# Altium PCB USBiso.PcbDoc
Units mil, origin at the board's own origin, x right, y up, seen from the top; angles counter-clockwise.
Board outline 2523.11 x 1676.2 mil, 2 copper layers (Top Layer, Bottom Layer); 34 components, 25 nets, 117 pads, 60 vias.
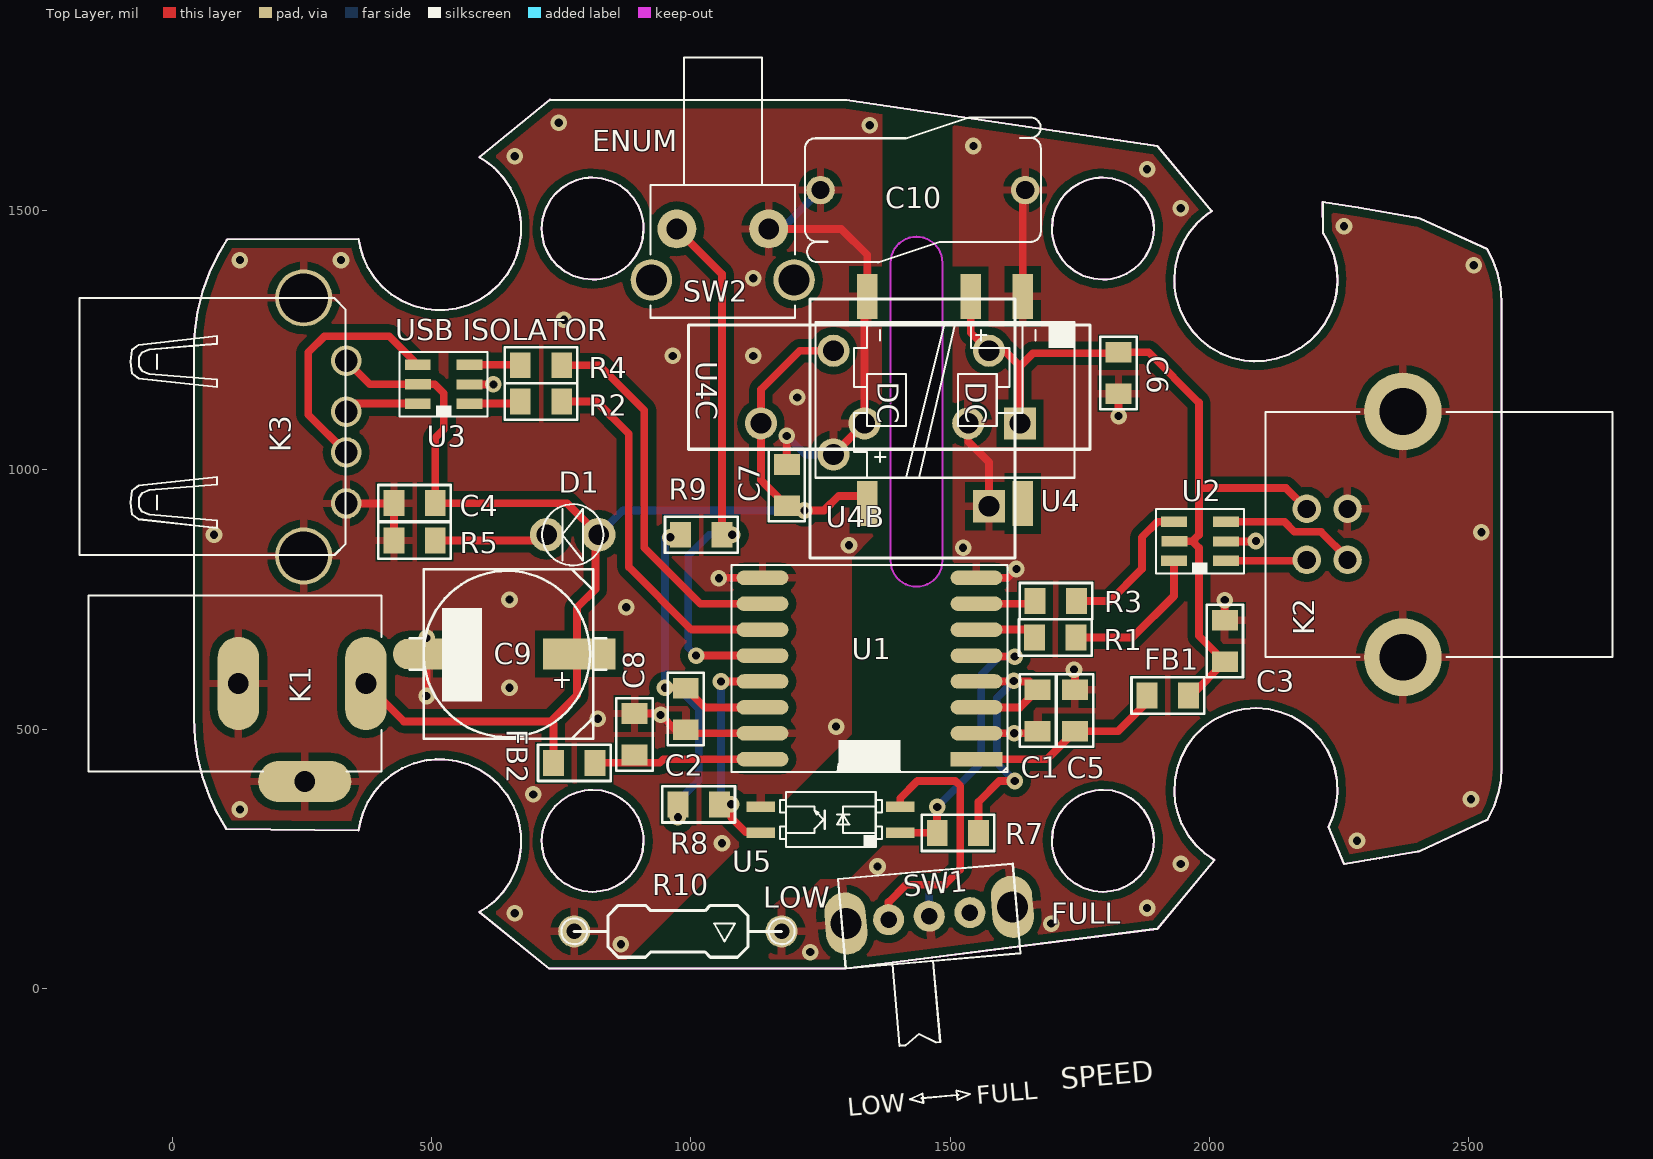
[diagram p0: Top Layer view]
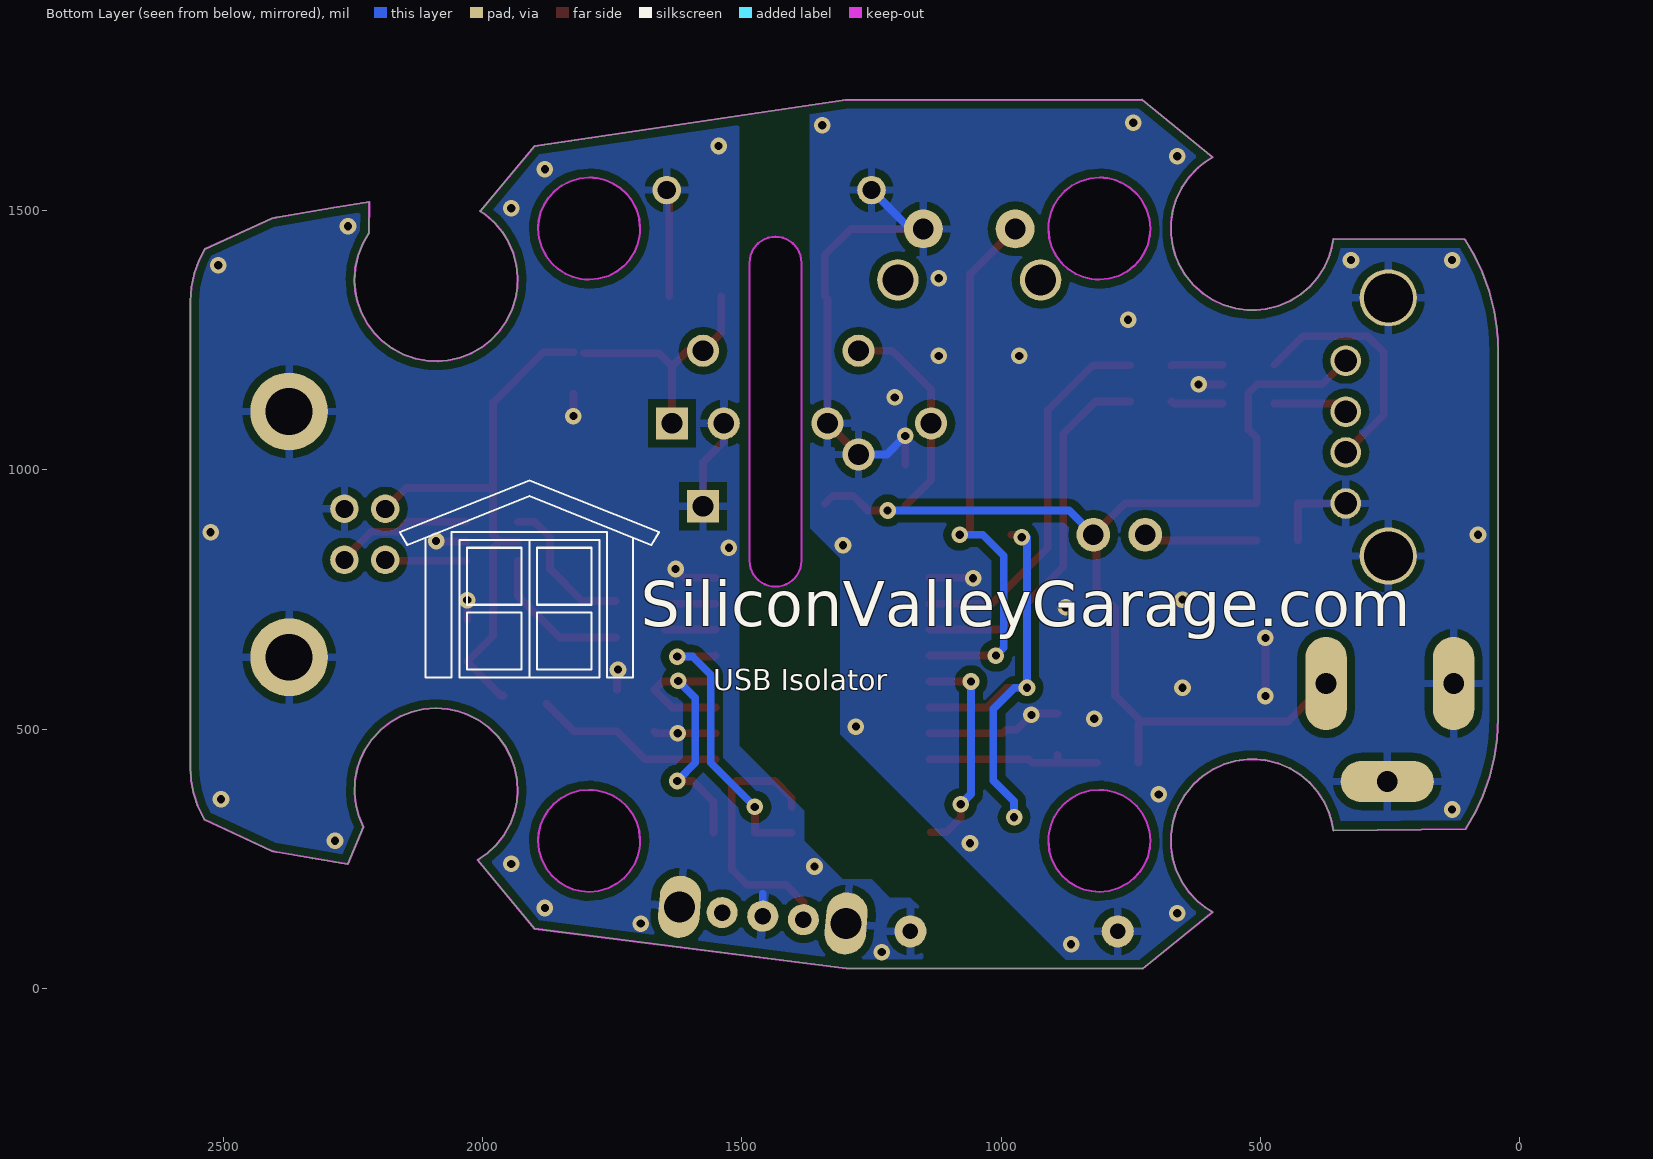
[diagram p1: Bottom Layer view, seen from below]

## Layer stack, top to bottom
Top Layer: signal copper 1.4
Dielectric: core 12.6, FR-4, Dk 4.8
Bottom Layer: signal copper 1.4

## Board outline
105.44,1445 358.95,1445.88 362.16,1428.46 367.13,1412.01 376.56,1390.95 389.5,1370.78 404.53,1353.62 421.79,1338.88 443.09,1325.67 466.08,1316.05 490.14,1310.2 507.75,1308.38 524.93,1308.5 547.8,1311.62 570.8,1318.35 591.5,1327.93 610.51,1340.33 629.19,1357.05 644.9,1376.39 657.29,1397.82 664.01,1414.21 668.73,1430.73 672.19,1453.54 672.22,1477.51 668.86,1500.07 662.32,1521.8 651.55,1544.44 637.42,1564.97 620.35,1582.9 606.52,1593.96 592,1603.15 728,1714.2 1299.68,1713.96 1900,1625 2005,1499.25 1994.81,1492.72 1976.15,1476.08 1961.72,1458.63 1949.89,1439.18 1940.94,1418.12 1934.91,1394.67 1932.56,1371.63 1933.18,1352.72 1936.21,1333.3 1943.41,1309.68 1954.29,1287.33 1968.66,1266.86 1984.31,1250.5 2002.24,1236.48 2022.12,1225.15 2044.71,1216.42 2067.32,1211.41 2086.17,1209.82 2105.81,1210.57 2130.11,1214.97 2153.57,1223.18 2175.58,1235.07 2193.65,1248.71 2209.66,1264.89 2223.23,1283.31 2234.52,1304.74 2242.13,1326.61 2245.9,1345.15 2247.44,1364.74 2245.9,1389.39 2240.48,1413.65 2231.23,1436.89 2219.79,1456.42 2218.86,1517.32 2287.5,1506.18 2397.09,1487.24 2399.78,1486.75 2402.47,1486.27 2406.78,1485.5 2536.17,1426.14 2547.73,1403.59 2556.35,1379.63 2562.16,1352.65 2564.14,1325.22 2564.14,425.04 2562.63,401.07 2558.18,377.4 2549.39,350.61 2537.1,325.68 2406.78,264.76 2404.09,264.28 2401.4,263.79 2397.09,263.02 2328.64,251.02 2260.08,239.56 2230.12,311.16 2238.97,331.99 2244.77,354 2247.34,376.74 2246.44,400.94 2242.12,423.7 2236.14,441.64 2227.7,459.39 2214.06,479.98 2197.25,498.3 2177.65,513.83 2157.98,525.05 2136.8,533.36 2114.51,538.56 2090.37,540.48 2067.27,538.84 2048.75,534.99 2030.14,528.67 2008.1,517.52 1987.95,502.96 1970.25,485.3 1956.82,467.07 1946.09,447 1938.34,425.47 1933.62,401.71 1932.56,378.58 1934.23,359.73 1938.34,340.51 1946.85,317.33 1958.97,295.63 1974.45,275.99 1990.99,260.52 2009.68,247.53 1900,115 1298.45,38.45 727,38 591.99,147.1 606.51,156.29 620.34,167.35 637.41,185.28 651.54,205.81 662.32,228.45 668.86,250.17 672.22,272.74 672.19,296.7 668.74,319.52 664.01,336.04 657.29,352.43 644.9,373.86 629.2,393.21 610.51,409.92 591.51,422.32 570.8,431.91 547.81,438.64 524.94,441.76 507.76,441.88 490.14,440.05 466.08,434.21 443.1,424.59 421.79,411.38 404.54,396.64 389.51,379.48 376.56,359.31 367.13,338.25 362.16,321.8 358.95,304.38 104.16,307.03 86.16,337.78 71,370.09 57.7,407.36 48.23,445.71 43.03,481.16 41.03,520.75 41.03,1229.51 41.56,1249.68 43.13,1269.85 48.46,1305.33 58.07,1343.92 71.35,1380.98 86.49,1413.09 104.57,1443.81
cut-out: 1385.22,1400 cw(c1435.22,1400) 1435.22,1450 cw(c1435.22,1400) 1485.22,1400 1485.22,825 cw(c1435.22,825) 1435.22,775 cw(c1435.22,825.22) 1385,825.22 1385,1400
cut-out: 1794.71,186.15 1802.36,186.45 1810.19,187.38 1825.43,191.07 1840.44,197.42 1854.53,206.42 1867.02,217.81 1877.35,231.12 1885.84,247.39 1891.4,266.19 1893.13,284.58 1892.84,292.23 1891.91,300.06 1888.22,315.3 1881.87,330.31 1872.87,344.4 1861.48,356.89 1848.17,367.22 1831.89,375.71 1813.1,381.27 1794.71,383 1787.06,382.7 1779.23,381.78 1763.99,378.09 1748.98,371.74 1734.89,362.74 1722.4,351.35 1712.07,338.04 1703.58,321.76 1698.02,302.97 1696.28,284.58 1696.58,276.93 1697.51,269.1 1701.2,253.86 1707.55,238.85 1716.55,224.76 1727.94,212.27 1741.25,201.94 1757.52,193.45 1776.32,187.89
cut-out: 810.46,186.15 818.11,186.45 825.94,187.38 841.18,191.07 856.18,197.42 870.27,206.42 882.77,217.81 893.1,231.12 901.59,247.39 907.15,266.19 908.88,284.58 908.58,292.23 907.66,300.06 903.96,315.3 897.61,330.31 888.62,344.4 877.23,356.89 863.92,367.22 847.64,375.71 828.85,381.27 810.46,383 802.8,382.7 794.98,381.78 779.74,378.09 764.73,371.74 750.64,362.74 738.14,351.35 727.82,338.04 719.33,321.76 713.76,302.97 712.03,284.58 712.33,276.93 713.26,269.1 716.95,253.86 723.3,238.85 732.29,224.76 743.68,212.27 757,201.94 773.27,193.45 792.06,187.89
cut-out: 810.46,1367.25 818.11,1367.55 825.94,1368.48 841.18,1372.17 856.18,1378.52 870.27,1387.52 882.77,1398.91 893.1,1412.22 901.59,1428.49 907.15,1447.29 908.88,1465.68 908.58,1473.33 907.66,1481.16 903.96,1496.4 897.61,1511.41 888.62,1525.5 877.23,1537.99 863.92,1548.32 847.64,1556.81 828.85,1562.37 810.46,1564.1 802.8,1563.81 794.98,1562.88 779.74,1559.19 764.73,1552.84 750.64,1543.84 738.14,1532.45 727.82,1519.14 719.33,1502.87 713.76,1484.07 712.03,1465.68 712.33,1458.03 713.26,1450.2 716.95,1434.96 723.3,1419.95 732.29,1405.86 743.68,1393.37 757,1383.04 773.27,1374.55 792.06,1368.99
cut-out: 1794.71,1367.25 1802.36,1367.55 1810.19,1368.48 1825.43,1372.17 1840.44,1378.52 1854.53,1387.52 1867.02,1398.91 1877.35,1412.22 1885.84,1428.49 1891.4,1447.29 1893.13,1465.68 1892.84,1473.33 1891.91,1481.16 1888.22,1496.4 1881.87,1511.41 1872.87,1525.5 1861.48,1537.99 1848.17,1548.32 1831.89,1556.81 1813.1,1562.37 1794.71,1564.1 1787.06,1563.81 1779.23,1562.88 1763.99,1559.19 1748.98,1552.84 1734.89,1543.84 1722.4,1532.45 1712.07,1519.14 1703.58,1502.87 1698.02,1484.07 1696.28,1465.68 1696.58,1458.03 1697.51,1450.2 1701.2,1434.96 1707.55,1419.95 1716.55,1405.86 1727.94,1393.37 1741.25,1383.04 1757.52,1374.55 1776.32,1368.99

## Design rules (kind name [scope] priority, off if disabled: settings)
AssemblyTestPointUsage [All] p1 off:
AssemblyTestpoint [All] p1 off: testpointundercomponent=TRUE minsize=40 maxsize=100 preferedsize=60 minholesize=0 maxholesize=40 preferedholesize=32 testpointgrid=1 usegrid=TRUE gridtolerance=0.01 allowsidetop=TRUE allowsidebottom=TRUE
Clearance Clearance_1 [All vs InPolygon] p1: gap=15
Clearance [All] p2: gap=4
ComponentClearance [All] p1 off: gap=10 collisioncheckmode=3 verticalgap=10 showdistances=FALSE
DiffPairsRouting [All] p1 off: maxlimit=10 minlimit=10 mostfreqgap=10 maxuncoupledlength=500
FabricationTestPointUsage TestPointUsage [All] p1 off: valid=0 allowmultiple=FALSE
FabricationTestpoint Testpoint [All] p1 off: side=3 testpointundercomponent=TRUE minsize=40 maxsize=100 preferedsize=60 minholesize=0 maxholesize=40 preferedholesize=32 testpointgrid=1 allowsidetop=TRUE allowsidebottom=TRUE usegrid=TRUE gridtolerance=0.01
FanoutControl Fanout_BGA [IsBGA] p1 off: bgadir=Out bgaviamode=Centered fanoutstyle=Auto fanoutdirection=Alternating viagrid=1 // Fanout_BGA (Default Rule)
FanoutControl Fanout_LCC [IsLCC] p2 off: bgadir=Out bgaviamode=Centered fanoutstyle=Auto fanoutdirection=Alternating viagrid=1 // Fanout_LCC (Default Rule)
FanoutControl Fanout_SOIC [IsSOIC] p3 off: bgadir=Out bgaviamode=Centered fanoutstyle=Auto fanoutdirection=Alternating viagrid=1 // Fanout_SOIC (Default Rule)
FanoutControl Fanout_Small [(CompPinCount < 5)] p4 off: bgadir=Out bgaviamode=Centered fanoutstyle=Auto fanoutdirection=OutThenIn viagrid=1 // Fanout_Small (Default Rule)
FanoutControl Fanout_Default [All] p5 off: bgadir=Out bgaviamode=Centered fanoutstyle=Auto fanoutdirection=Alternating viagrid=1 // Fanout_Default (Default Rule)
Height [All] p1 off: minheight=0 maxheight=1000 prefheight=500
HoleSize [All] p1: absolutevalues=TRUE maxlimit=500 minlimit=1 maxpercent=80.000 minpercent=20.000
LayerPairs [All] p1 off: enforce=TRUE
MinimumAnnularRing "Minimum Annular Ring" [All] p1: minimumring=5 // This is manufacturing dependent. Sierra = 5. This can go to 4 if needed, but keep 5 if possible
MinimumSolderMaskSliver [All] p1 off: minsoldermaskwidth=10
PasteMaskExpansion [All] p1 off: expansion=0
PlaneClearance [All] p1: clearance=6
PlaneConnect "PlaneConnect GND" [InNet('GND')] p1: planeconnectstyle=Direct reliefexpansion=6 reliefentries=4 reliefconductorwidth=10 reliefairgap=6
PlaneConnect "PlaneConnect GENERIC" [All] p2: planeconnectstyle=Relief reliefexpansion=20 reliefentries=4 reliefconductorwidth=10 reliefairgap=10
PolygonConnect PolygonConnect_1 [ISVIA] p1: connectstyle=Direct reliefconductorwidth=10 reliefentries=4 polygonreliefangle="90 Angle"
PolygonConnect [All] p2: connectstyle=Relief reliefconductorwidth=15 reliefentries=4 polygonreliefangle="90 Angle"
RoutingPriority [All] p1 off: routingpriority=0
RoutingTopology [All] p1 off: topology=Shortest
RoutingVias "Routing Vias" [All] p1: holewidth=10 width=20 viastyle="Through Hole" minholewidth=10 minwidth=20 maxholewidth=80 maxwidth=100 // Generic routing via rules
ShortCircuit "Short Circuit Generic Rule" [All] p1: allowed=FALSE // Short circuit Rule : No shorts allowed
SilkToSilkClearance [All] p1 off: silktosilkclearance=10
SilkscreenOverComponentPads [All] p1 off: minsilkscreentomaskgap=10
SolderMaskExpansion "SolderMask Expansion Via's" [(IsVia)] p1: expansion=-40 // Via's should be painted closed. Set to -40
SolderMaskExpansion "Solder Mask Expansion Generic" [All] p2: expansion=2 // Generic solder mask expansion
UnRoutedNet "Un Routed Net" [All] p1:  // Broken Nets not allowed
Width [(InNetClass('common-6mil'))] p1: maxlimit=6 minlimit=6 preferedwidth=6 minimp=50.000000 maximp=50.000000 favimp=50.000000 // For Common-6MIL class
Width "Generic Width Rules" [All] p2: maxlimit=100 minlimit=3.5 preferedwidth=10 minimp=50.000000 maximp=50.000000 favimp=50.000000 // Generic width rules applicable if no specific rule is in effect
4 further rules are at their usual default settings.

## Components (designator, comment, footprint, x,y, rotation, side; value= is the part's Value field where it differs from the comment)
C1 "100nF" 0805C-TBD 1669,566 r270 top
C2 "100nF" 0805C-TBD 990,569 r270 top
C3 "100nF" 0805C-TBD 2030,640 r90 top
C4 "100nF" 0805C-TBD 497,936 r180 top
C5 "100nF" 0805C-TBD 1741,566 r270 top
C6 "10uF" 0805C-GENERIC 1825,1217 r270 top
C7 "10uF" 0805C-GENERIC 1185,940.75 r90 top
C8 "100nF" 0805C-TBD 891,460 r90 top
C9 "220uF-25V" PANACAP-F-GENERIC 645,645 r180 top
C10 "1nF - X1Y1" C-X1Y1-10MM 1250,1540 r0 top
D1 "LED-YELLOW-3MM" LED-3MM-YELLOW 822,875 r180 top
FB1 "1KZ" 0805FB-1KZ 1950,565 r180 top
FB2 "1KZ" 0805FB-1KZ 805,435 r180 top
K1 "DCPOWERJACK" DCPOWER 373,588 r0 top
K2 "USB-B" USB-B 2188,925 r90 top
K3 "USB-A" USB-A 335,1211 r270 top
R1 "27R" 0805R-27 1733,677 r180 top
R2 "27R" 0805R-27 741,1132 r180 top
R3 "27R" 0805R-27 1734,747 r180 top
R4 "27R" 0805R-27 741,1202 r180 top
R5 "330R" 0805R-330 427,864 r0 top
R7 "1K" 0805R-1K 1545,300 r180 top
R8 "1K" 0805R-1K 985,355 r0 top
R9 "10K" 0805R-10K 980,875 r0 top
R10 "1M *" R-1/4W-SAFETY 1175,110 r270 top
SW1 "SW-SPDT-CK-OS102011" CK-OS102011 1373,-224 r5 top
SW2 "ENUM" SW-OMRONRA-Y 1150,1465 r180 top
U1 "ADUM4160" SO16W 1551,442 r180 top
U2 "USBLC6-2" SOT23-6 2032,825 r180 top
U3 "USBLC6-2" SOT23-6 573,1128 r180 top
U4 "DCDC5V" VBT1-CUI 1640,1335 r270 top
U4B "DCDC5V" DCDC-DIP8 1575,930 r180 top
U4C "DCDC5V" DCDC-SIP5 1635,1090 r270 top
U5 "ACPL217" ACPL217 1403.9,300 r180 top

## Footprints (in the part's own frame and the unit in brackets; to place one, negate y for a bottom-side part, rotate by r counter-clockwise, add the part's x,y. Pads: shape width x height; smd on the part's side, far side on the other; paste and mask are expansions set on the pad)
0805C-GENERIC [mil] "CAPACITOR 0805"
  rect 40x50 smd: 1(-10,0) 2(70,0)
  silkscreen extent -40,-35 100,35, body extent -11,-25 70,25, height 26
0805C-TBD [mil] "CAPACITOR 0805"
  rect 40x50 smd: 1(-10,0) 2(70,0)
  silkscreen extent -40,-35 100,35, body extent -11,-25 70,25, height 26
0805FB-1KZ [mil] "FERRITE BEAD 0805"
  rect 40x50 smd: 1(-10,0) 2(70,0)
  silkscreen extent -40,-35 100,35, body extent -11,-25 70,25, height 26
0805R-1K [mil] "RESISTOR 0805"
  rect 40x50 smd: 1(-10,0) 2(70,0)
  silkscreen extent -40,-35 100,35, body extent -11,-25 70,25, height 27
0805R-10K [mil] "RESISTOR 0805"
  rect 40x50 smd: 1(0,0) 2(80,0)
  silkscreen extent -30,-35 110,35, body extent -1,-25 80,25, height 27
0805R-27 [mil] "RESISTOR 0805"
  rect 40x50 smd: 1(-10,0) 2(70,0)
  silkscreen extent -40,-35 100,35, body extent -11,-25 70,25, height 27
0805R-330 [mil] "RESISTOR 0805"
  rect 40x50 smd: 1(0,0) 2(80,0)
  silkscreen extent -30,-35 110,35, body extent -1,-25 80,25, height 27
ACPL217 [mm] "OPTOCOUPLER"
  rect 1.4x0.508 smd mask+0.051: 1(0,0) 2(0,-1.27) 3(6.83,-1.27) 4(6.83,0)
  silkscreen extent 0.9,-2 5.9,0.7, body extent -0.2,-1.9 6.8,0.7, height 2.05
C-X1Y1-10MM [mm] "X1Y1 CAPACITOR 10MM PITCH"
  round 1.4 hole 0.9: 1(0,0) 2(10.033,0)
  silkscreen extent -0.76,-3.55 10.79,3.56
CK-OS102011 [mil] "C&K CK-OS102011MA1QN1"
  round 60 hole 32 mask+2: C(118.11,354.33) NC(39.37,354.33) NO(196.85,354.33)
  oval 80x120 hole 60 mask+2: M1(279.53,358.27) M2(-43.31,354.33)
  silkscreen extent -51,110 287,441, body extent -51,111 288,441, height 200
DCDC-DIP8 [mil]
  rect 62x62 hole 40: 1(0,0)
  round 62 hole 40: 4(0,-300) 5(300,-300) 7(300,-100)
  silkscreen extent -50,-400 345,100
DCDC-SIP5 [mil]
  rect 62x62 hole 40: 1(0,0)
  round 62 hole 40: 2(0,-100) 4(0,-300) 6(0,-500)
  silkscreen extent -190,-640 50,135
DCPOWER [mil]
  oval 80x180 hole 40: 1(0,0) 2(-246,0)
  oval 180x80 hole 40: 3(-118,-189)
  silkscreen extent -535,-170 30,170
LED-3MM-YELLOW [mil]
  round 65 hole 40: A(0,0) K(100,0)
  silkscreen extent -9,-59 109,59, body extent -15,-63 114,67, height 250
PANACAP-F-GENERIC [mil]
  rect 140x59.06 smd: +(-140,0)
  oval 140x59.06 smd: -(150,0)
  silkscreen extent -192,-163 187,163, body extent -195,-163 195,163, height 402
R-1/4W-SAFETY [mil] "SAFETY RESISTOR"
  round 62 hole 30: 1(0,0) 2(0,-400)
  silkscreen extent -50,-425 50,25, body extent -46,-412 45,12, height 116
SO16W [mil]
  rect 100x28 smd: 1(0,0)
  oval 100x28 smd: 2(0,-50) 3(0,-100) 4(0,-150) 5(0,-200) 6(0,-250) 7(0,-300) 8(0,-350) 9(413,-350) 10(413,-300) 11(413,-250) 12(413,-200) 13(413,-150) 14(413,-100) 15(413,-50) 16(413,0)
  silkscreen extent -60,-375 473,25, body extent 5,-375 407,27, height 61
SOT23-6 [mil]
  rect 50x20 smd: 1(0,0) 2(0,-37) 3(0,-75) 4(100,-75) 5(99.41,-37.4) 6(100,0)
  silkscreen extent -35,-100 135,25, body extent 0,-95 99,20, height 52
SW-OMRONRA-Y [mil]
  round 75 hole 40: 1(0,0) 2(177.17,0)
  round 80 hole 60: M1(-49.21,98.42) M2(226.38,98.42)
  silkscreen extent -51,-331 228,171, body extent -87,-398 265,160, height 283
USB-A [mm]
  round 1.5 hole 1.1: 1(0,0) 2(2.5,0) 3(4.5,0) 4(7,0)
  round 2.8 hole 2.4: M0(-3.073,-2.083) M1(9.576,-2.083)
  silkscreen extent -3.08,-13.08 9.53,-0.03, body extent -4.42,-12.53 11.38,1.17, height 3.7
USB-B [mil]
  round 55 hole 35: 1(0,0) 2(-98.42,0) 3(-98.42,-78.74) 4(0,-78.74)
  round 150 hole 90.55: 5(-286.22,-185.43) 6(187.8,-185.43)
  silkscreen extent -285,-590 187,79, body extent -343,-590 243,79, height 437
VBT1-CUI [mm] "DC DC CONVERTOR"
  rect 2.2x1 smd mask+0.051: 1(0,0) 2(0,-2.54) 4(0,-7.62) 5(10.16,-7.62) 8(10.16,0)
  silkscreen extent 1.27,-10.16 8.89,2.54, body extent -0.77,-10.03 10.68,2.67, height 6.35

## Part data
C1 C2 C3 C4 C5 C8: library part 0805C-100nF-25V-X7R-MUR, "CAPACITOR 0805 CERAMIC"
C6 C7: library part 0805C-4U7-25V-X5R-TDK, "CAPACITOR 0805 CERAMIC"
C9: library part PANACAP-220UF-25V-FK, "GENERIC CAPACITOR POLARISED"
C10: library part C-X1Y1-10MM-1NF, "CAPACITOR X1Y1 CLASS"
FB1 FB2: library part 0805FB-1KZ, "FERRITE BEAD 1000 OHM 6A"
K1: "Connector, Power Jack, Mini .08\", Right Angle, Thru-Hole"
K2: "USB B DEVICE CONNECTOR"
K3: "USB A HOST CONNECTOR"
R1 R2 R3 R4: library part 0805R-27, "RESISTOR 0805 1/4 WATT THIN FILM"
R5: library part 0805R-330, "RESISTOR 0805 1/4 WATT THIN FILM"
R7 R8: library part 0805R-1K, "RESISTOR 0805 1/4 WATT THIN FILM"
R9: library part 0805R-10K, "RESISTOR 0805 1/4 WATT THIN FILM"
R10: library part TH4-1M-1/4W-SAFETY, "GENERIC THROUGH HOLE 1/4 WATT RESISTOR"
SW1: "SWITCH DPDT"
SW2: library part SW-PB-YELLOW-RA, "SW-D6-R / SW-DS-S / SW-14X14 / SW-7X7"
U1: "USB Isolator"
U2 U3: "USB ESD PROTECTION"
U4: library part VBT1-S5-S5-SMT, "DC DC CONVERTOR 5V - 5V SMT"
U4B: library part VBSD1-DIP, "DC DC CONVERTOR 5V - 5V"
U4C: library part VIBLSD1-SIP, "DC DC CONVERTOR 5V - 5V"
U5: "QUAD OPTOCOUPLER"

## Free pads (board coordinates)
  round 150 on Mech1 mask+2: 0(810,284) 1(1795,285) 2(1795,1466) 3(810,1466)

## Via types
v1: diameter 32, hole 16, Top Layer to Bottom Layer, 60 vias

## Nets (pads, with @x,y where several pads share a name; then routed paths per layer and width w, separated by ;. In a path a pad name is that pad's centre, name@x,y a point inside that pad or via, vN(x,y) a via of type N, cw(c..) or ccw(c..) an arc to the next point about the centre after c; other vN are vias at no path point)
GND: C1.2 C3.2 C5.1 C6.2 C10.2 K2.4 K2.5 K2.6 R10.1 SW1.C SW1.M1 SW1.M2 U1.2 U1.8 U2.2 U4.1 U4B.1 U4C.2 | length 810.1
  Top Layer w15: U4C.2 1535,1055 1575,1015 U4B.1 ; U1.2 v1(1624,492) 1665,492 C1.2 ; U1.8 1611,792 v1(1628,809) ; U4.1 1640,1535 C10.2 ; v1(1739,615) 1741,613 C5.1 ; v1(1825,1104) C6.2 ; C3.2 v1(2030,749) ; U2.2 2089,862 v1(2090,863)
  Bottom Layer w15: SW1.C 1459.78,181.78
  other v1: 1230,70 1695,125 1880,155 1360,235 1945,240 2285,285 2505,365 1525,850 2525,880 2510,1395 2260,1470 1945,1505 1880,1580 1545,1625
NetC1_1: C1.1 R7.1 U1.3 U1.4 | length 624.4
  Top Layer w15: U1.3 1635,542 C1.1 1653,592 U1.4 ; R7.1 1555,360 1595,400 v1(1625,400)
  Bottom Layer w15: v1(1623,593) 1590,560 1590,435 v1(1625,400)
NetC2_1: C2.1 R8.1 R9.1 U1.14 | length 833.4
  Top Layer w15: v1(950,580) 989,580 C2.1 1027,542 U1.14 ; v1@955,875 R9.1
  Bottom Layer w15: v1@955,875 950,870 v1(950,580) 974,580 1015,539 1015,401 975,361 v1(975,330)
  other v1: 960,870
NetC2_2: C2.2 C4.2 C7.2 C8.2 C9.- C10.1 K1.2 K1.3 K3.4 K3.M0 K3.M1 R5.1 R10.2 SW2.1 U1.9 U1.15 U3.2 U4.4 U4B.7 U4C.4 U5.3 | length 1583.7
  Top Layer w15: K3.4 426.41,935.41 C4.2 R5.1 ; v1(490,564) C9.-@490,619 ; C9.-@490,621 v1(490,676) ; U3.2 v1(619,1165) ; C8.2 939,530 v1(941.5,527.5) 970,499 C2.2 997,492 U1.15 ; v1(1054,791) 1055,790 1057,792 U1.9 ; SW2.1 1290,1465 1340,1415 U4.4 1335,1330 U4C.4 U4B.7 ; C7.2 v1(1185,1065.75)
  Bottom Layer w15: v1(1054,791) v1@1054,793 ; SW2.1 1175,1465 C10.1 ; v1(1185,1065.75) 1220.75,1030 U4B.7
  other v1: 865,85 660,145 1060,280 130,345 695.99,374.04 1280,505 820,520 650,580 875,735 650,750 1305,855 80,875 1205,1140 965,1220 1120,1220 755,1290 1120,1370 130,1405 325,1405 660,1605 1345,1665 745,1670
NetC3_1: C3.1 C6.1 FB1.1 K2.1 U2.5 U4.2 U4B.4 U4C.1 | length 1564.9
  Top Layer w15: U4.2 1540,1265 U4B.4 1605,1230 1635,1200 ; U4C.1 1635,1200 ; C6.1@1805,1225 1660,1225 1635,1200 ; C6.1 1883,1227 1980,1130 1980,965 ; U2.5 1967.6,862.4 ; FB1.1 1965,565 C3.1 1980,680 1980,850 1967.6,862.4 ; K2.1 2148,965 1980,965 ; 1967.6,862.4 1980,874.8 1980,965
NetC4_1: C4.1 C7.1 C9.+ D1.A FB2.2 K1.1 K3.1 U3.5 U4.5 U4B.5 U4C.6 | length 2611.7
  Top Layer w15: K3.1 380.6,1165.4 U3.5 505.6,1165.4 523,1148 523,1078 507,1062 C4.1 761,936 D1.A 816,869 816,770 780,734 780,565 730,515 ; K1.1 446,515 730,515 ; FB2.2 735,510 730,515 ; C7.1 1135,980.75 U4C.6 1135,1155 1210,1230 U4B.5 ; v1(1219,921.75) 1256.75,921.75 1285,950 1325,950 U4.5
  Bottom Layer w15: D1.A 868.75,921.75 v1(1219,921.75)
NetC5_2: C5.2 FB1.2 U1.1 | length 370.3
  Top Layer w15: U1.1 1687,442 C5.2 1824,496 FB1.2@1877,549
NetC8_1: C8.1 FB2.1 U1.16 | length 340.9
  Top Layer w15: FB2.1 C8.1@891,435 ; C8.1 C8.1@891,435 ; U1.16 947,442 940,435 C8.1@891,435
NetD1_K: D1.K R5.2 | length 219.6
  Top Layer w15: R5.2 711,864 D1.K
NetK2_2: K2.2 U2.1 | length 157.9
  Top Layer w15: U2.1 2183.42,825 K2.2@2188,829.58
NetK2_3: K2.3 U2.3 | length 263.9
  Top Layer w15: U2.3 2145,900 2164,881 2215.32,881 K2.3@2266.74,829.58
NetK3_2: K3.2 U3.6 | length 144.4
  Top Layer w15: K3.2 350.43,1128 U3.6
NetK3_3: K3.3 U3.4 | length 470
  Top Layer w15: K3.3 262,1106.83 262,1227 293,1258 418,1258 U3.4
NetR1_1: R1.1 U2.6 | length 290.1
  Top Layer w15: R1.1 1852,677 1932,757 U2.6
NetR1_2: R1.2 U1.6 | length 97
  Top Layer w15: U1.6 R1.2@1648,692
NetR2_1: R2.1 U1.11 | length 719.8
  Top Layer w15: R2.1 818,1132 880,1070 880,813 1001,692 U1.11
NetR2_2: R2.2 U3.1 | length 99.7
  Top Layer w15: U3.1 667,1128 R2.2
NetR3_1: R3.1 U2.4 | length 287.1
  Top Layer w15: R3.1 1808,747 1870,809 1870,870 1900,900 U2.4
NetR3_2: R3.2 U1.7 | length 115.1
  Top Layer w15: U1.7 1659,742 R3.2
NetR4_1: R4.1 U1.10 | length 732.8
  Top Layer w15: R4.1 823,1202 910,1115 910,850 1018,742 U1.10
NetR4_2: R4.2 U3.3 | length 98.4
  Top Layer w15: U3.3 670,1203 R4.2
NetR7_2: R7.2 U1.5 U5.1 | length 565.6
  Top Layer w15: U5.1 R7.2 v1(1475,350) ; U1.5 1553,640 v1(1625,640)
  Bottom Layer w15: v1(1475,350) 1560,435 1560,605 1595,640 v1(1625,640)
NetR8_2: R8.2 U1.13 U5.4 | length 419.9
  Top Layer w15: v1(1058,592) U1.13 ; v1(1078,355) 1078,329 1106,301 U5.4@1135,301
  Bottom Layer w15: v1(1058,592) 1058,375 v1(1078,355)
NetR9_2: R9.2 SW2.2 U1.12 | length 1054.6
  Top Layer w15: SW2.2 1060,1377.83 R9.2 ; v1(1010,642) U1.12
  Bottom Layer w15: v1(1010,642) 995,657 995,834.5 1035.5,875 v1(1080,875)
NetSW1_NC: SW1.NC U5.2 | length 509.4
  Top Layer w15: SW1.NC 1381.34,166.34 1415,200 1490,200 1519.5,229.5 1519.5,390.5 1510,400 1436.97,400 1403.9,366.93 U5.2
pads on no net: SW1.NO SW2.M1 SW2.M2 U4.8

## Polygon pours and split planes (outlines as drawn)
NetC2_2 on Bottom Layer "TOP GND GND" (solid, remove dead copper, pour order 7): 1310,490 1310,830 1369,889 1369,1756.95 138.73,1756.95 5.73,1623.95 3.73,1623.95 3.73,319.95 333.73,-10.05 815.18,-6.65 815.18,-4.82
GND on Bottom Layer "TOP GND GND" (solid, remove dead copper, pour order 5): 1215.22,-7.78 1150,-10 1150,150 1175,175 1215,175 1250,210 1305,210 1380,285 1380,343.03 1505,468.03 1505,1775 1490,1780 2267.22,1778.22 2629.22,1416.22 2629.22,154.22 2485.22,10.22
NetC2_2 on Top Layer "TOP GND GND" (solid, remove dead copper, pour order 7): 1310,490 1310,830 1369,889 1369,1756.95 138.73,1756.95 5.73,1623.95 3.73,1623.95 3.73,319.95 333.73,-10.05 813.33,-6.67
GND on Top Layer "TOP GND GND" (solid, remove dead copper, pour order 5): 1215.22,-7.78 1150,-10 1150,150 1175,175 1215,175 1250,210 1305,210 1380,285 1380,343.03 1505,468.03 1505,1775 1490,1780 2267.22,1778.22 2629.22,1416.22 2629.22,154.22 2485.22,10.22

## Keep-outs
Keep-Out Layer:
  lines w4: 41.03,520.75 41.03,1229.51 41.56,1249.68 43.13,1269.85 48.46,1305.33 58.07,1343.92 71.35,1380.98 86.49,1413.09 104.57,1443.81 105.44,1445 358.95,1445.88 362.16,1428.46 367.13,1412.01 376.56,1390.95 389.5,1370.78 404.53,1353.62 421.79,1338.88 443.09,1325.67 466.08,1316.05 490.14,1310.2 507.75,1308.38 524.93,1308.5 547.8,1311.62 570.8,1318.35 591.5,1327.93 610.51,1340.33 629.19,1357.05 644.9,1376.39 657.29,1397.82 664.01,1414.21 668.73,1430.73 672.19,1453.54 672.22,1477.51 668.86,1500.07 662.32,1521.8 651.55,1544.44 637.42,1564.97 620.35,1582.9 606.52,1593.96 592,1603.15 728,1714.2 1299.68,1713.96 1900,1625 2005,1499.25 1994.81,1492.72 1976.15,1476.08 1961.72,1458.63 1949.89,1439.18 1940.94,1418.12 1934.91,1394.67 1932.56,1371.63 1933.18,1352.72 1936.21,1333.3 1943.41,1309.68 1954.29,1287.33 1968.66,1266.86 1984.31,1250.5 2002.24,1236.48 2022.12,1225.15 2044.71,1216.42 2067.32,1211.41 2086.17,1209.82 2105.81,1210.57 2130.11,1214.97 2153.57,1223.18 2175.58,1235.07 2193.65,1248.71 2209.66,1264.89 2223.23,1283.31 2234.52,1304.74 2242.13,1326.61 2245.9,1345.15 2247.44,1364.74 2245.9,1389.39 2240.48,1413.65 2231.23,1436.89 2219.79,1456.42 2218.86,1517.32 2287.5,1506.18 2397.09,1487.24 2399.78,1486.75 2402.47,1486.27 2406.78,1485.5 2536.17,1426.14 2547.73,1403.59 2556.35,1379.63 2562.16,1352.65 2564.14,1325.22 2564.14,425.04 2562.63,401.07 2558.18,377.4 2549.39,350.61 2537.1,325.68 2406.78,264.76 2404.09,264.28 2401.4,263.79 2397.09,263.02 2328.64,251.02 2260.08,239.56 2230.12,311.16 2238.97,331.99 2244.77,354 2247.34,376.74 2246.44,400.94 2242.12,423.7 2236.14,441.64 2227.7,459.39 2214.06,479.98 2197.25,498.3 2177.65,513.83 2157.98,525.05 2136.8,533.36 2114.51,538.56 2090.37,540.48 2067.27,538.84 2048.75,534.99 2030.14,528.67 2008.1,517.52 1987.95,502.96 1970.25,485.3 1956.82,467.07 1946.09,447 1938.34,425.47 1933.62,401.71 1932.56,378.58 1934.23,359.73 1938.34,340.51 1946.85,317.33 1958.97,295.63 1974.45,275.99 1990.99,260.52 2009.68,247.53 1900,115 1298.45,38.45 727,38 591.99,147.1 606.51,156.29 620.34,167.35 637.41,185.28 651.54,205.81 662.32,228.45 668.86,250.17 672.22,272.74 672.19,296.7 668.74,319.52 664.01,336.04 657.29,352.43 644.9,373.86 629.2,393.21 610.51,409.92 591.51,422.32 570.8,431.91 547.81,438.64 524.94,441.76 507.76,441.88 490.14,440.05 466.08,434.21 443.1,424.59 421.79,411.38 404.54,396.64 389.51,379.48 376.56,359.31 367.13,338.25 362.16,321.8 358.95,304.38 104.16,307.03 86.16,337.78 71,370.09 57.7,407.36 48.23,445.71 43.03,481.16 41.03,520.75 ; 712.03,284.58 712.33,276.93 713.26,269.1 716.95,253.86 723.3,238.85 732.29,224.76 743.68,212.27 757,201.94 773.27,193.45 792.06,187.89 810.46,186.15 818.11,186.45 825.94,187.38 841.18,191.07 856.18,197.42 870.27,206.42 882.77,217.81 893.1,231.12 901.59,247.39 907.15,266.19 908.88,284.58 908.58,292.23 907.66,300.06 903.96,315.3 897.61,330.31 888.62,344.4 877.23,356.89 863.92,367.22 847.64,375.71 828.85,381.27 810.46,383 802.8,382.7 794.98,381.78 779.74,378.09 764.73,371.74 750.64,362.74 738.14,351.35 727.82,338.04 719.33,321.76 713.76,302.97 712.03,284.58 ; 712.03,1465.68 712.33,1458.03 713.26,1450.2 716.95,1434.96 723.3,1419.95 732.29,1405.86 743.68,1393.37 757,1383.04 773.27,1374.55 792.06,1368.99 810.46,1367.25 818.11,1367.55 825.94,1368.48 841.18,1372.17 856.18,1378.52 870.27,1387.52 882.77,1398.91 893.1,1412.22 901.59,1428.49 907.15,1447.29 908.88,1465.68 908.58,1473.33 907.66,1481.16 903.96,1496.4 897.61,1511.41 888.62,1525.5 877.23,1537.99 863.92,1548.32 847.64,1556.81 828.85,1562.37 810.46,1564.1 802.8,1563.81 794.98,1562.88 779.74,1559.19 764.73,1552.84 750.64,1543.84 738.14,1532.45 727.82,1519.14 719.33,1502.87 713.76,1484.07 712.03,1465.68 ; 1385.22,825 ccw(c1435.22,825) 1435.22,775 ccw(c1435.22,825) 1485.22,825 1485.22,1400 ccw(c1435.22,1400) 1435.22,1450 ccw(c1435.22,1400) 1385.22,1400 1385.22,825 ; 1696.28,284.58 1696.58,276.93 1697.51,269.1 1701.2,253.86 1707.55,238.85 1716.55,224.76 1727.94,212.27 1741.25,201.94 1757.52,193.45 1776.32,187.89 1794.71,186.15 1802.36,186.45 1810.19,187.38 1825.43,191.07 1840.44,197.42 1854.53,206.42 1867.02,217.81 1877.35,231.12 1885.84,247.39 1891.4,266.19 1893.13,284.58 1892.84,292.23 1891.91,300.06 1888.22,315.3 1881.87,330.31 1872.87,344.4 1861.48,356.89 1848.17,367.22 1831.89,375.71 1813.1,381.27 1794.71,383 1787.06,382.7 1779.23,381.78 1763.99,378.09 1748.98,371.74 1734.89,362.74 1722.4,351.35 1712.07,338.04 1703.58,321.76 1698.02,302.97 1696.28,284.58 ; 1696.28,1465.68 1696.58,1458.03 1697.51,1450.2 1701.2,1434.96 1707.55,1419.95 1716.55,1405.86 1727.94,1393.37 1741.25,1383.04 1757.52,1374.55 1776.32,1368.99 1794.71,1367.25 1802.36,1367.55 1810.19,1368.48 1825.43,1372.17 1840.44,1378.52 1854.53,1387.52 1867.02,1398.91 1877.35,1412.22 1885.84,1428.49 1891.4,1447.29 1893.13,1465.68 1892.84,1473.33 1891.91,1481.16 1888.22,1496.4 1881.87,1511.41 1872.87,1525.5 1861.48,1537.99 1848.17,1548.32 1831.89,1556.81 1813.1,1562.37 1794.71,1564.1 1787.06,1563.81 1779.23,1562.88 1763.99,1559.19 1748.98,1552.84 1734.89,1543.84 1722.4,1532.45 1712.07,1519.14 1703.58,1502.87 1698.02,1484.07 1696.28,1465.68

## Other copper
Top Layer:
  text ".Layer_Name" at -3213.22,-2841.72 h80
Bottom Layer:
  text ".Layer_Name" at -3213.22,-2941.72 h80

## Silkscreen, mask and mechanical layers (free items; w line width, h text height)
Top Overlay:
  drawing of 343 lines, arcs and shapes, not listed
  text "ENUM" at 810,1615 h40
  text "USB ISOLATOR" at 430,1250 h40
  text "LOW" at 1140,155 h40
  text "FULL" at 1695,125 h40
  text "SPEED" at 1715,-195 h40 r5
  text "FULL" at 1552.14,-223.52 h35 r5
  text "LOW" at 1304,-247 h35 r5
Bottom Overlay:
  lines w4: 1710,869.15 1710,830 1710,600 1760,600 1760,880 1910,880 2060,880 2060,600 2110,600 2110,830 2110,869.15 ; 1910,600 1775,600 1775,865 1910,865 ; 1910,600 1910,865 ; 1910,600 1910,865 ; 1910,600 2045,600 2045,865 1910,865 ; 1660,880 1910,980 2160,880 2145,855 1910,950 1675,855 1660,880 ; 1790,615 1895,615 1895,725 1790,725 1790,615 ; 1790,740 1790,850 1895,850 1895,740 1790,740 ; 1925,615 2030,615 2030,725 1925,725 1925,615 ; 1925,740 1925,850 2030,850 2030,740 1925,740
  text "SiliconValleyGarage.com" at 1695,669.5 h150
  text "USB Isolator" at 1555,575 h40
  text ".Layer_Name" at -3223.22,-3141.72 h80
Top Solder:
  text ".Layer_Name" at -3213.22,-2741.72 h80
Bottom Solder:
  text ".Layer_Name" at -3213.22,-3041.72 h80
Mechanical 1:
  lines w4: 1795,285 1795,1466
  text ".Layer_Name" at -3213.22,-3241.72 h80
Mechanical 2:
  lines w4: 3950,-2510.85 3950,-2550 3950,-2780 4000,-2780 4000,-2500 4150,-2500 4300,-2500 4300,-2780 4350,-2780 4350,-2550 4350,-2510.85 ; 4150,-2780 4015,-2780 4015,-2515 4150,-2515 ; 4150,-2780 4150,-2515 ; 4150,-2780 4150,-2515 ; 4150,-2780 4285,-2780 4285,-2515 4150,-2515 ; 3900,-2500 4150,-2400 4400,-2500 4385,-2525 4150,-2430 3915,-2525 3900,-2500 ; 4030,-2765 4135,-2765 4135,-2655 4030,-2655 4030,-2765 ; 4030,-2640 4030,-2530 4135,-2530 4135,-2640 4030,-2640 ; 4165,-2765 4270,-2765 4270,-2655 4165,-2655 4165,-2765 ; 4165,-2640 4165,-2530 4270,-2530 4270,-2640 4165,-2640
  lines w8: -3413.22,-2341.72 6386.78,-2341.72 ; -2413.22,-3441.72 -2413.22,-2341.72 ; 486.78,-3441.72 486.78,-2341.72 ; 3686.78,-3441.72 3686.78,-2941.72 ; 3686.78,-2341.72 3686.78,-2941.72 ; 6386.78,-2941.72 3686.78,-2941.72 ; -3513.22,-3541.72 -3513.22,4458.28 6486.78,4458.28 6486.78,-3541.72 -3513.22,-3541.72 ; -3413.22,-3441.72 -3413.22,4358.28 6386.78,4358.28 6386.78,-3441.72 -3413.22,-3441.72
  text "Layer Stack" at -3213.22,-2441.72 h100
  text ".Layer_Name" at -3213.22,-2541.72 h80
  text "Board Material : FR4  62 Mils (1.6mm) end thickness" at -2313.22,-2541.72 h80
  text "Number of components" at 586.78,-2541.72 h80
  text ".Component_Count" at 1586.78,-2541.72 h80
  text "SiliconValleyGarage.com" at 4515,-2545 h200
  text "Double sided" at -2313.22,-2641.72 h80
  text "Number of holes" at 586.78,-2641.72 h80
  text ".Hole_Count" at 1586.78,-2641.72 h80
  text "HASL finish - Lead free not required" at -2313.22,-2741.72 h80
  text "Number of pads" at 586.78,-2741.72 h80
  text ".Pad_Count" at 1586.78,-2741.72 h80
  text "Top and bottom Liquid soldermask Blue OR CHEAPEST" at -2313.22,-2841.72 h80
  text "Number of vias" at 586.78,-2841.72 h80
  text ".Via_Count" at 1586.78,-2841.72 h80
  text "Top and bottom Liquid silkscreen White" at -2313.22,-2941.72 h80
  text "Printed" at 586.78,-3041.72 h80
  text ".Print_Date" at 1586.78,-3041.72 h80
  text "USB Isolator" at 3780,-3110 h150
  text "Use Keepout layer for board contour milling" at -2313.22,-3141.72 h80
  text ".Print_Time" at 1586.78,-3141.72 h80
  text "Scale" at 586.78,-3241.72 h80
  text ".Print_Scale" at 1586.78,-3241.72 h80
  text "Drawn By : Vincent Himpe" at 3789.45,-3376.55 h80

## Text inside footprints (layer, text, board x,y; h text height)
C9: Top Overlay "+" at 771.97,609.57 h35 r180
K1: Mechanical 1 "Milled holes" at -148,710 h45; Mechanical 1 "120X40" at 160,286 h45; Mechanical 1 "140X40" at 506,490 h45 r90; Mechanical 1 "140X40" at 81,487 h45 r90
U4: Top Overlay "DC" at 1530,1170 h40 r270; Top Overlay "DC" at 1360,1170 h40 r270